# Altium PCB AdcPmodWM8782.PcbDoc
Units mm, origin at the board's own origin, x right, y up, seen from the top; angles counter-clockwise.
Board outline 95.25 x 20.95 mm, 4 copper layers (Component Side, Ground Plane, Power Plane, Solder Side), stack 0.844 mm thick; 45 components, 37 nets, 151 pads, 71 vias.
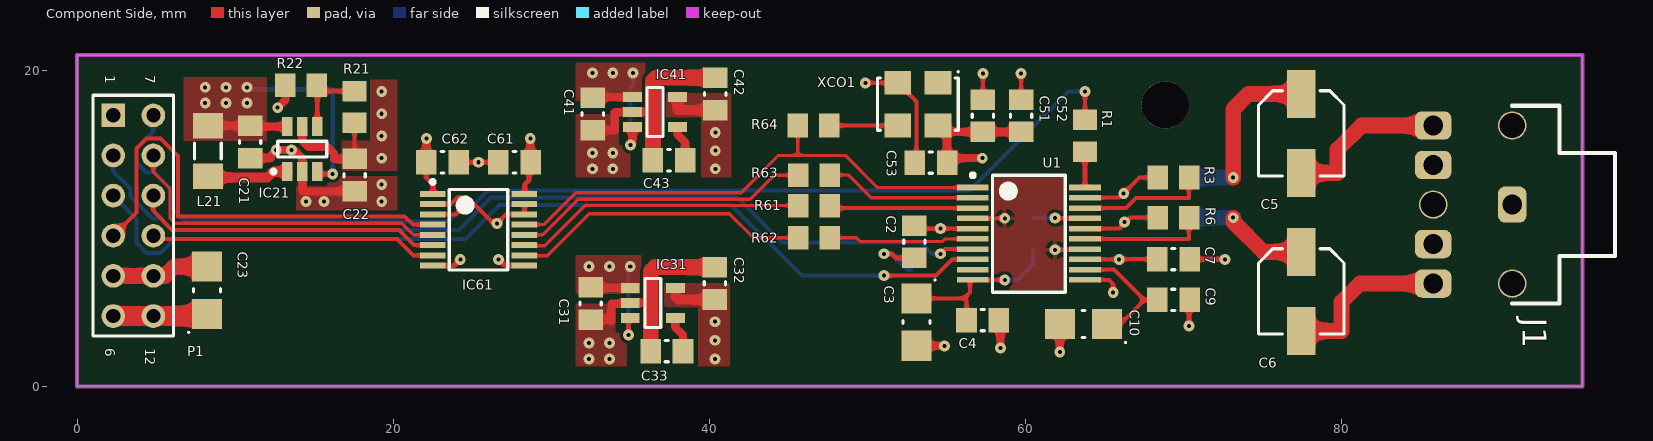
[diagram p0: Component Side view]
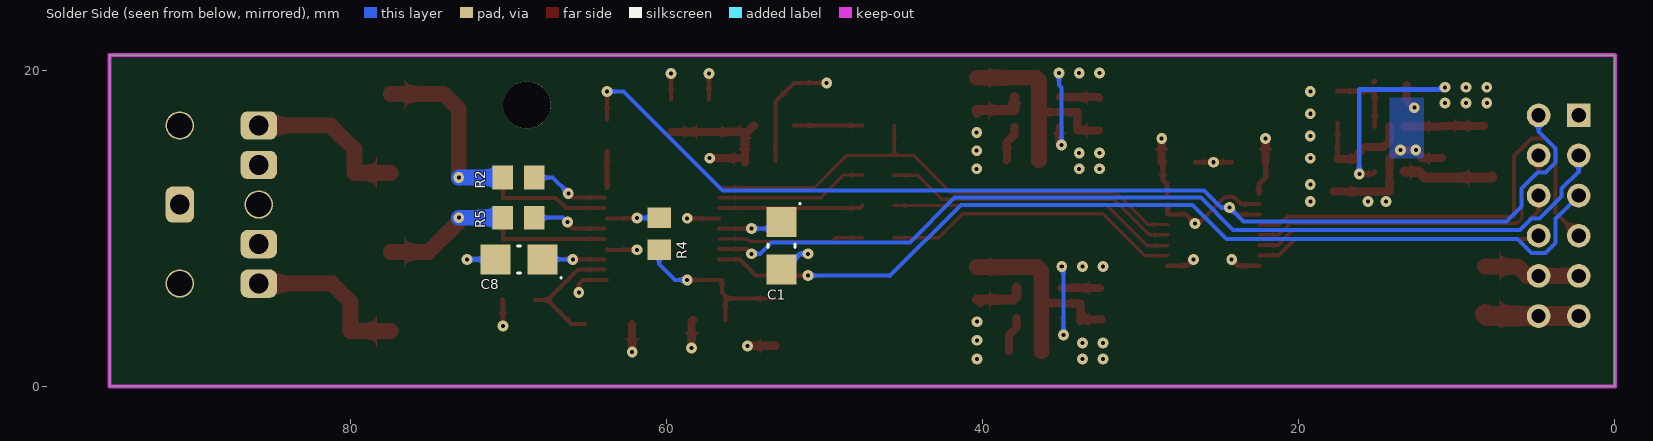
[diagram p1: Solder Side view, seen from below]
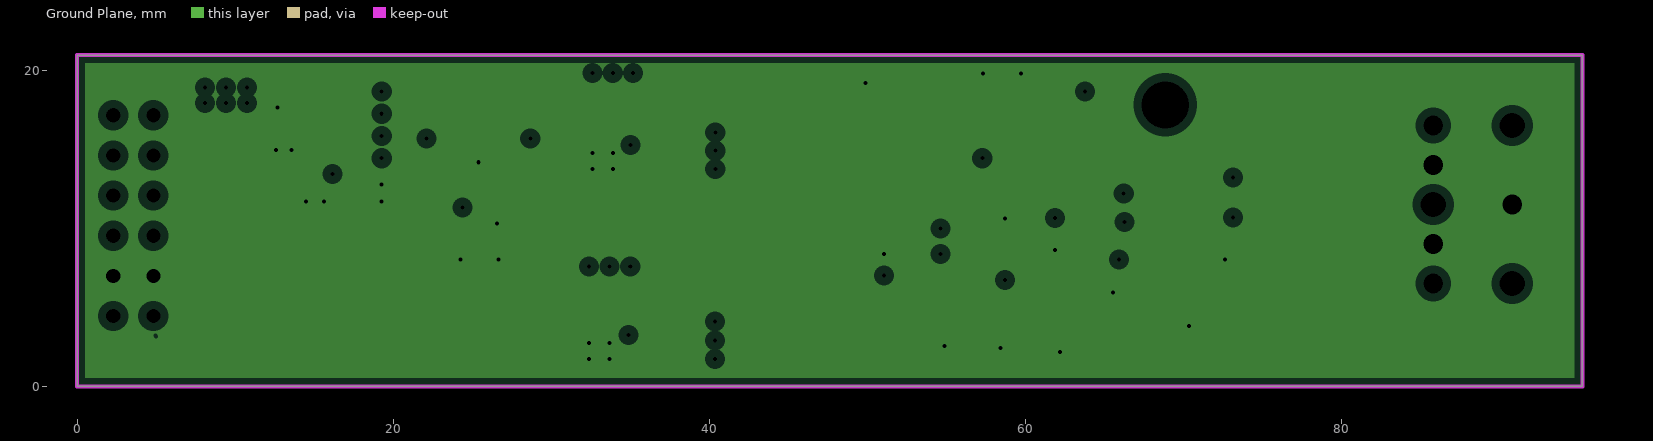
[diagram p2: Ground Plane, clearances drawn from the general rule]
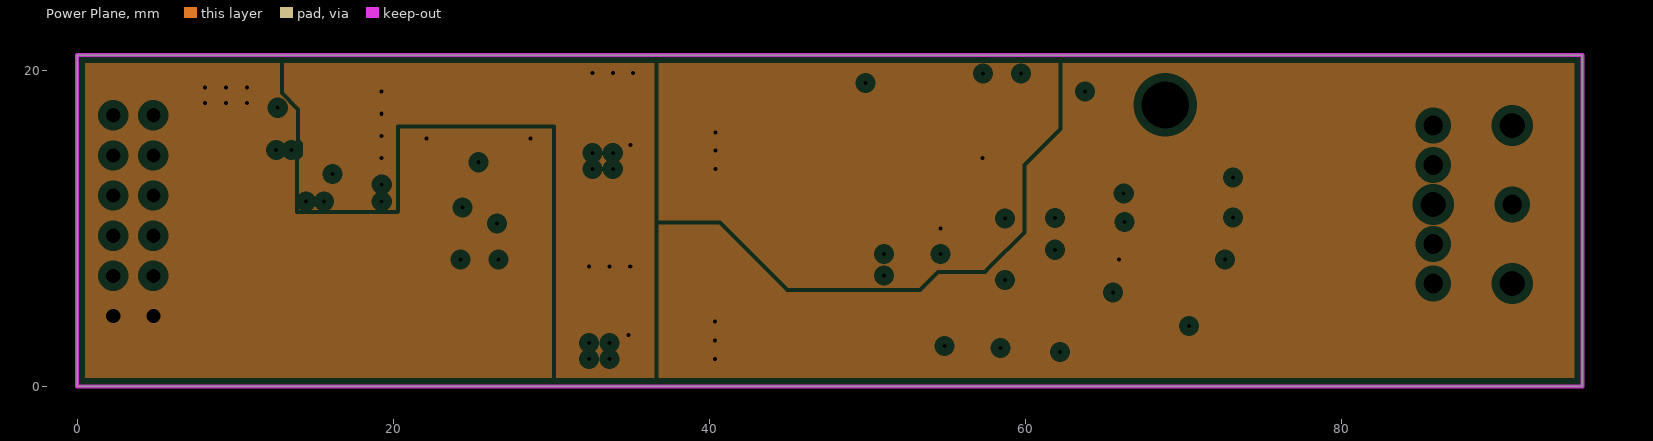
[diagram p3: Power Plane, clearances drawn from the general rule]

## Layer stack, top to bottom
Top Solder: solder mask 0.0102, Solder Resist, Dk 3.5
Component Side: signal copper 0.0356
Dielectric 1: core 0.32, FR-4, Dk 4.8
Ground Plane: plane copper 0.036, net AGND
Dielectric 3: prepreg 0.127, Dk 4.2
Power Plane: plane copper 0.036, net (Multiple Nets)
Dielectric 4: core 0.254, Dk 4.2
Solder Side: signal copper 0.0356
Bottom Solder: solder mask 0.0102, Solder Resist, Dk 3.5

## Board outline
0,0 0,20.95 95.25,20.95 95.25,0

## Design rules (kind name [scope] priority, off if disabled: settings)
Clearance [All] p1: gap=0.203 except(0.254: Arc-Region Arc-Text Track-Region Track-Text SMDPad-Region SMDPad-Text THPad-Region THPad-Text Via-Region Via-Text Fill-Region Fill-Text Poly-Region Poly-Text Region-Region Region-Text Text-Text)
HoleSize [All] p1: absolutevalues=TRUE maxlimit=6 minlimit=0.25 maxpercent=80.000 minpercent=20.000
HoleToHoleClearance [All] p1: gap=0.305 allowstackedmicrovias=TRUE
MinimumSolderMaskSliver [All] p1: minsoldermaskwidth=0.1
PlaneClearance [All] p1: clearance=0.508
PlaneConnect NoConnect [InNamedPolygon('SOLDER_GND_PLANE')] p1: planeconnectstyle=NoConnect reliefexpansion=0.508 reliefentries=4 reliefconductorwidth=0.254 reliefairgap=0.254
PlaneConnect NoRelief [All] p2: planeconnectstyle=Direct reliefexpansion=0.508 reliefentries=4 reliefconductorwidth=0.254 reliefairgap=0.254
PlaneConnect [All] p3: planeconnectstyle=Relief reliefexpansion=0.508 reliefentries=4 reliefconductorwidth=0.254 reliefairgap=0.254
PolygonConnect PolygonConnect_1 [All vs IsNamedPolygon('LDO_REG_PLANE')] p1: connectstyle=Direct reliefconductorwidth=0.254 reliefentries=4 polygonreliefangle="90 Angle" airgapwidth=0.254
PolygonConnect PolygonConnect_NoRelief [All vs (IsNamedPolygon('LDO_REG_PLANE') OR IsNamedPolygon('SPS_PLANE') OR IsNamedPolygon('SOLDER_GND_PLANE'))] p2: connectstyle=Direct reliefconductorwidth=0.254 reliefentries=4 polygonreliefangle="90 Angle" airgapwidth=0.254
PolygonConnect [All] p3: connectstyle=Relief reliefconductorwidth=0.254 reliefentries=4 polygonreliefangle="90 Angle" airgapwidth=0.254
RoutingVias [All] p1: holewidth=0.5 width=1 viastyle="Through Hole" minholewidth=0.25 minwidth=0.66 maxholewidth=1 maxwidth=2 useviatemplates=TRUE viatemplateguid#1={FEAE9B3F-B14B-47A1-B2CF-42D978F5AA74}
SilkToSolderMaskClearance [IsPad] p1: minsilkscreentomaskgap=0.102 clearancetoexposedcopper=TRUE
SolderMaskExpansion [All] p1: expansion=0.076
Width DigitalPower [InNet('3V3')] p1: maxlimit=4 minlimit=0.254 preferedwidth=0.508 minimp=50.000000 maximp=50.000000 favimp=50.000000
Width AnalogLinearPower [(InNet('AVDD') OR InNet('3V3CLK'))] p2: maxlimit=1.27 minlimit=0.254 preferedwidth=0.508 minimp=50.000000 maximp=50.000000 favimp=50.000000
Width AnalogPower [InNet('5V')] p3: maxlimit=4 minlimit=0.254 preferedwidth=0.508 minimp=50.000000 maximp=50.000000 favimp=50.000000
Width [All] p4: maxlimit=1 minlimit=0.203 preferedwidth=0.254
24 further rules are at their usual default settings.

## Classes and differential pairs
component class "A/C WM8782": C1 C2 C3 C4 C5 C6 C7 C8 C9 C10 R1 R2 R3 R4 R5 R6 U1
component class AdcPmod: J1 P1
component class "INTERFEJS CYFROWY": C61 C62 IC61 R61 R62 R63
component class ZASILANIE: C21 C22 C23 C31 C32 C33 C41 C42 C43 IC21 IC31 IC41 L21 R21 R22
component class ZEGAR: C51 C52 C53 R64 XCO1
net class SPS_CTRL_GND: AGND

## Components (designator, comment, footprint, x,y, rotation, side; value= is the part's Value field where it differs from the comment)
C1 "10 uF" CAP_POL1206 52.731,8.89 r270 bottom
C2 "0.1uF" CAP0805 52.985,9.144 r270 top
C3 "10 uF" CAP_POL1206 53.112,4.064 r270 top
C4 "0.1uF" CAP0805 57.303,4.191 r180 top
C5 "10 uF" "CAP EL SMD Dia. 5mm" 77.46,16 r270 top
C6 "10 uF" "CAP EL SMD Dia. 5mm" 77.46,6 r270 top
C7 "0.1uF" CAP0805 69.368,8.044 r0 top
C8 "10 uF" CAP_POL1206 69.342,8.027 r0 bottom
C9 "0.1uF" CAP0805 69.368,5.461 r180 top
C10 "10 uF" CAP_POL1206 63.681,3.937 r180 top
C21 "10uF" CAP0805 10.944,15.455 r90 top
C22 "10uF" CAP0805 17.556,13.357 r90 top
C23 "47uF" CAP_POL1206 8.225,6.075 r90 top
C31 "1uF" CAP0805 32.489,5.238 r90 top
C32 "2.2uF" CAP0805 40.363,6.514 r270 top
C33 "0.01uF" CAP0805 37.315,2.227 r0 top
C41 "1uF" CAP0805 32.631,17.224 r90 top
C42 "2.2uF" CAP0805 40.378,18.499 r270 top
C43 "0.01uF" CAP0805 37.457,14.302 r0 top
C51 "0.1uF" CAP0805 57.32,17.116 r270 top
C52 "0.1uF" CAP0805 59.733,17.116 r270 top
C53 "0.01uF" CAP0805 54.02,14.15 r180 top
C61 "0.1uF" CAP0805 27.675,14.175 r0 top
C62 "0.1uF" CAP0805 23.125,14.175 r180 top
IC21 "" "SOT23 (DDC TI)" 14.25,15.008 r90 top
IC31 "" "SOT23 (5) (DBVTI)" 36.426,5.275 r0 top
IC41 "" "SOT23 (5) (DBVTI)" 36.568,17.35 r0 top
IC61 "74AVCH4T245" TSSOP16 25.4,9.906 r0 top
J1 "Phonejack Stereo SW" "Phone Jack Mini Stereo SJ1 - 354X" 90.805,11.5 r180 top
L21 "4.7uH" "IND1206 (HS)" 8.273,14.881 r270 top
P1 "PMOD 6X2" HDR2X6_CEN 2.286,17.145 r270 top
R1 "10k" RES0805 63.774,15.85 r90 top
R2 "10k" RES0805 69.368,13.208 r180 bottom
R3 "5k" RES0805 69.368,13.208 r180 top
R4 "3.3k" RES0805 60.478,9.652 r270 bottom
R5 "10k" RES0805 69.368,10.668 r0 bottom
R6 "5k" RES0805 69.368,10.668 r180 top
R21 "1.8M" RES0805 17.556,17.675 r270 top
R22 "200k" RES0805 14.177,19.052 r0 top
R61 "RES" RES0805 46.635,11.43 r0 top
R62 "RES" RES0805 46.635,9.398 r0 top
R63 "RES" RES0805 46.625,13.35 r0 top
R64 "RES" RES0805 46.6,16.5 r180 top
U1 "WM8782A" "SSOP16 5.3mm" 60.224,9.652 r0 top
XCO1 "XCO" "XCO 5X3.2MM (HS)" 53.2,17.85 r270 top

## Footprints (in the part's own frame and the unit in brackets; to place one, negate y for a bottom-side part, rotate by r counter-clockwise, add the part's x,y. Pads: shape width x height; smd on the part's side, far side on the other; paste and mask are expansions set on the pad)
CAP0805 [mm] "Chip Capacitor, 2-Leads, Body 2,00x1,25mm, IPC Low Density"
  rect 1.3x1.55 smd: 1(-1.025,0) 2(1.025,0)
  silkscreen extent -0.1,-0.67 0.1,0.67, body extent -1.1,-0.72 1.1,0.72, height 1.5
"CAP EL SMD Dia. 5mm" [mm] "Aluminum Electrolytic Capacitor, Body 5,30x5,30x5,80mm, IPC Low Density"
  rect 3.05x1.8 smd: 1(-2.5,0) 2(2.5,0)
  silkscreen extent -2.7,-2.7 2.7,2.7, body extent -2.75,-2.75 2.75,2.75, height 5.8
CAP_POL1206 [mm] "Chip Tantalum Capacitor, 2-Leads, Body 3,20x1,60mm, IPC Low Density"
  rect 1.9x1.9 smd: 1(-1.5,0) 2(1.5,0)
  silkscreen extent -2.71,-0.85 0.1,1.21, body extent -1.7,-0.9 1.7,0.9, height 2
HDR2X6_CEN [mm] "Connector; Header; 6x2 Position"
  rect 1.5x1.5 hole 0.9: 1(0,0)
  round 1.5 hole 0.9: 2(2.54,0) 3(5.08,0) 4(7.62,0) 5(10.16,0) 6(12.7,0) 7(0,2.54) 8(2.54,2.54) 9(5.08,2.54) 10(7.62,2.54) 11(10.16,2.54) 12(12.7,2.54)
  silkscreen extent -1.27,-1.27 13.97,3.81
"IND1206 (HS)" [mm] "Chip Inductor, 2-Leads, Body 3,20x1,60mm, IPC Low Density"
  rect 1.6x1.9 smd: 1(-1.6,0) 2(1.6,0)
  silkscreen extent -0.5,-0.85 0.5,0.85, body extent -1.7,-0.9 1.7,0.9, height 2
"Phone Jack Mini Stereo SJ1 - 354X" [mm]
  rrect50% 1.8x2.3 hole 1.25: 1(0,0)
  rrect50% 2.3x1.8 hole 1.25: 2(5,-5) 3(5,5) 4(5,-2.5) 5(5,2.5)
  round 1.8 hole 1.6: 6(0,5) 6(0,-5) 6(5,0)
  silkscreen extent -6.5,-6.25 0,6.25, body extent -6.45,-6.13 8.55,6.07, height 4.7
RES0805 [mm] "Chip Resistor, 2-Leads, Body 2,00x1,25mm, IPC Low Density"
  rect 1.3x1.5 smd: 1(-1,0) 2(1,0)
  body extent -1.07,-0.7 1.08,0.7, height 1.5
"SOT23 (5) (DBVTI)" [mm] "SOT23, 5-Leads, Body 2,90x2,80mm, Pitch 0,95mm, IPC Low Density"
  rect 1.2x0.65 smd: 1(-1.425,0.95) 2(-1.425,0) 3(-1.425,-0.95) 4(1.425,-0.95) 5(1.425,0.95)
  silkscreen extent -0.5,-1.55 0.5,1.55, body extent -0.88,-1.52 0.87,1.53, height 1.1
"SOT23 (DDC TI)" [mm] "SOT23, 6-Leads, Body 2,90x2,80mm, Pitch 0,95mm, IPC Low Density"
  rect 1.2x0.65 smd: 1(-1.425,0.95) 2(-1.425,0) 3(-1.425,-0.95) 4(1.425,-0.95) 5(1.425,0) 6(1.425,0.95)
  silkscreen extent -1.55,-1.55 0.5,1.95, body extent -0.88,-1.52 0.87,1.53, height 1.1
"SSOP16 5.3mm" [mm] "SOP, 20-Leads, Body 7,20x5,30mm, Pitch 0,65mm, IPC Low Density"
  rect 2x0.35 smd: 1(-3.55,2.925) 2(-3.55,2.275) 3(-3.55,1.625) 4(-3.55,0.975) 5(-3.55,0.325) 6(-3.55,-0.325) 7(-3.55,-0.975) 8(-3.55,-1.625) 9(-3.55,-2.275) 10(-3.55,-2.925) 11(3.55,-2.925) 12(3.55,-2.275) 13(3.55,-1.625) 14(3.55,-0.975) 15(3.55,-0.325) 16(3.55,0.325) 17(3.55,0.975) 18(3.55,1.625) 19(3.55,2.275) 20(3.55,2.925)
  silkscreen extent -3.67,-3.7 2.3,3.82, body extent -2.7,-3.7 2.7,3.7, height 2
TSSOP16 [mm] "SOP, 16-Leads, Body 5,00x4,40mm, Pitch 0,65mm, IPC Low Density"
  rect 1.6x0.38 smd: 1(-2.9,2.275) 2(-2.9,1.625) 3(-2.9,0.975) 4(-2.9,0.325) 5(-2.9,-0.325) 6(-2.9,-0.975) 7(-2.9,-1.625) 8(-2.9,-2.275) 9(2.9,-2.275) 10(2.9,-1.625) 11(2.9,-0.975) 12(2.9,-0.325) 13(2.9,0.325) 14(2.9,0.975) 15(2.9,1.625) 16(2.9,2.275)
  silkscreen extent -3.02,-2.55 1.85,3.15, body extent -2.25,-2.55 2.25,2.55, height 2
"XCO 5X3.2MM (HS)" [mm] "XCO, Concave, 4-Leads, Pitch 2,54mm,  Body 5,00x3,20mm,  IPC Low Density"
  rect 1.5x1.7 smd: 1(-1.35,1.27) 2(-1.35,-1.27) 3(1.35,-1.27) 4(1.35,1.27)
  silkscreen extent -2.1,-2.55 1.65,2.6, body extent -1.65,-2.55 1.65,2.55, height 1

## Part data
C1 C3 C8 C10 C23: library part CAP_POL, "Capacitor Tantalum - Polymer"
C2 C4 C7 C9 C21 C22 C31 C32 C33 C41 C42 C43 C51 C52 C53 C61 C62: library part CAP, "Ceramic X7R"
C5 C6: library part CAP_POL, "Electrolytic"
IC21: library part TPS6107x, "Adjustable, 600-mA Switch, 90% Efficient PFM/PWM Boost Converter"
IC31 IC41: library part TPS730x
IC61: "Translation - Voltage Levels 4-Bit Dual-Supply Bus Xcvr"
J1: "3-Conductor Jack with 2 break contacts (normals) and 2 auxiliary make contacts"
L21: library part IND, "Inductor"
P1: library part "Header 6X2A", "Header, 6-Pin, Dual row"
R1 R2 R3 R5 R6 R22: library part RES, "Thin Film"
R4: library part RES, "Resistor"
R21: library part RES, "Thick Film"
R61 R62 R63 R64: "Resistor"
U1: library part WM8782, "24-Bit, 192 kHz Stereo ADC"
XCO1: "Standard Clock Oscillator"

## Free pads (board coordinates)
  round 3 hole 3: 2(68.85,17.8)

## Via types
v1: diameter 0.686, hole 0.254, Component Side to Solder Side, 71 vias

## Nets (pads, with @x,y where several pads share a name; then routed paths per layer and width w, separated by ;. In a path a pad name is that pad's centre, name@x,y a point inside that pad or via, vN(x,y) a via of type N, cw(c..) or ccw(c..) an arc to the next point about the centre after c; other vN are vias at no path point)
3V3: C21.2 C23.1 C61.2 C62.2 IC21.3 IC21.6 IC61.1 IC61.16 L21.1 P1.6 P1.12 | length 30.6
  Component Side w0.254: IC21.3 IC21.3@15.244,13.539
  Component Side w0.305: IC21.3 15.351,13.432 v1(16.174,13.432) ; C62.2 22.1,13.2 22.525,12.775 22.525,12.206 IC61.1 ; IC61.16 28.325,12.206 28.325,12.775 28.6,13.05 C61.2@28.6,14.2
  Component Side w0.508: L21.1 8.274,16.48 C21.2@10.694,16.48 ; C21.2@10.693,16.481 C21.2@10.694,16.48 ; C21.2 C21.2@10.694,16.48 ; IC21.6@13.253,16.48 IC21.6 10.741,16.433 C21.2@10.694,16.48 ; C62.2 v1(22.1,15.685) ; C61.2@28.6,14.2 C61.2@28.625,14.175 ; C61.2@28.675,14.2 v1(28.675,15.685)
  Component Side w1.27: P1.6 P1.12 8.095,4.445 C23.1
  Solder Side w0.305: v1@10.741,18.818 10.782,18.777 16.174,18.777 v1(16.174,13.432)
  other v1: 8.105,17.918 9.423,17.918 10.741,17.918 8.105,18.918 9.423,18.918 10.741,18.918
5V: C22.2 C31.2 C41.2 IC21.5 IC31.1 IC31.3 IC41.1 IC41.3 R21.2 | length 23.7
  Component Side w0.254: C22.2 R21.2@17.556,16.7 ; C31.2@32.479,6.126 32.489,6.136 C31.2@32.578,6.225 ; C41.2@32.582,18.298 C41.2 ; v1(34.891,3.243) 34.891,4.215 IC31.3
  Component Side w0.508: IC21.5 14.25,15.525 14.636,15.139 15.845,15.139 16.255,14.73 16.255,14.382 C22.2 ; C31.2@32.578,6.225 IC31.1 ; C41.2 32.682,18.3 IC41.1 ; v1(35.016,15.258) 35.143,15.385 IC41.3
  Solder Side w0.254: v1(34.891,3.243) 34.891,7.429 v1@35.001,7.539 ; v1(35.016,15.258) 35.016,18.91 35.174,19.068 v1(35.174,19.83)
  other v1: 32.381,7.572 33.691,7.572 35.001,7.572 19.275,14.43 19.275,15.836 19.275,17.243 19.275,18.65 32.606,19.83 33.895,19.83
AGND: C1.2 C2.2 C3.2 C4.1 C7.2 C8.2 C9.1 C10.2 C21.1 C22.1 C23.2 C31.1 C32.1 C33.1 C41.1 C42.1 C43.1 C51.1 C52.1 C53.2 C61.1 C62.1 IC21.2 IC31.2 IC41.2 IC61.2 IC61.8 IC61.9 IC61.14 IC61.15 J1.1 J1.4 J1.5 P1.5 P1.11 R22.1 U1.4 U1.11 U1.14 XCO1.2 | length 91.6
  Component Side w0.254: IC61.2 23.652,11.531 24.105,11.984 24.663,11.984 26.347,10.3 v1(26.57,10.3) 27.151,10.881 IC61.14 IC61.15 ; C62.1@24.225,14.175 v1(25.4,14.175) C61.1@26.575,14.175 ; v1(49.875,19.2) XCO1.2 53.11,18.02 C53.2@53.11,14.265 ; U1.4 v1(58.7,10.627) ; C51.1 v1(57.32,19.783) ; C52.1 v1(59.733,19.783) ; v1(61.875,8.636) 63.733,8.636 U1.14 ; U1.11 65.304,6.727 65.558,6.473 v1(65.558,5.927)
  Component Side w0.305: IC61.8 23.852,7.631 v1(24.248,8.027) ; v1(26.67,8.027) 27.066,7.631 IC61.9 ; v1(51.054,8.382) 51.553,8.382 51.816,8.119 C2.2 ; v1(70.358,3.81) 70.358,5.426 C9.1 ; C7.2 72.627,8.044 v1(72.644,8.027)
  Component Side w0.508: C21.1 12.281,14.43 12.281,14.628 v1(12.6,14.947) v1(13.556,14.947) 13.751,14.947 14.25,14.447 IC21.2 14.259,13.574 14.259,12.332 C22.1@17.806,12.332 ; v1(12.695,17.625) 13.177,18.106 R22.1 ; C31.1 33.805,4.213 ; C41.1 34.02,16.199 34.02,17.342 34.028,17.35 IC41.2 36.416,17.35 36.432,17.366 36.441,17.375 ; 33.805,4.086 33.805,5.229 34.955,5.229 IC31.2 36.29,5.275 ; C3.2 54.907,2.564 v1(54.883,2.54) ; C4.1 58.42,4.099 v1(58.42,2.413) ; v1(62.181,2.159) C10.2
  Component Side w1: P1.5 P1.11 5.567,6.985 6.157,7.575 C23.2 ; C33.1 36.304,2.241 36.304,7.28 36.563,7.539 C32.1 ; C43.1 36.447,14.302 36.447,19.333 36.637,19.524 C42.1
  Solder Side w0.305: v1(51.054,8.382) 51.562,8.382 52.554,7.39 C1.2 ; C8.2 v1(72.644,8.027)
  other v1: 32.381,1.73 33.691,1.73 32.381,2.746 33.691,2.746 14.475,11.7 15.625,11.7 19.275,11.7 19.275,12.775 32.606,13.761 33.895,13.761 32.606,14.75 33.895,14.75
AVDD: C7.1 C8.1 C32.2 IC31.5 U1.13 | length 9.7
  Component Side w0.254: U1.13@63.949,8.027 v1(65.939,8.027) 65.956,8.044 C7.1
  Component Side w0.508: C32.2@40.149,5.275 C32.2
  Component Side w0.635: IC31.5 37.851,5.687 38.049,5.489 C32.2
  Solder Side w0.254: v1(65.939,8.027) C8.1
  other v1: 40.363,1.73 40.363,2.908 40.363,4.086
BCLK: R62.2 U1.6 | length 9.2
  Component Side w0.203: R62.2@47.61,9.398 49.302,9.398 49.537,9.163 54.756,9.163 54.92,9.327 U1.6
BCLK_BUF: IC61.10 R62.1 | length 19.1
  Component Side w0.203: IC61.10 28.326,8.255 29.744,8.255 32.411,10.922 41.275,10.922 42.799,9.398 R62.1
COM: R4.1 U1.17 | length 3.3
  Component Side w0.254: v1(61.875,10.652) 61.9,10.627 U1.17
  Solder Side w0.254: R4.1 v1(61.875,10.652)
DOUT: R63.2 U1.2 | length 9.7
  Component Side w0.203: R63.2 47.65,13.375 48.8,13.375 50.248,11.927 U1.2
DOUT_BUF: IC61.12 R63.1 | length 18.9
  Component Side w0.203: IC61.12 29.453,9.581 31.709,11.836 42.586,11.836 44.1,13.35 R63.1
DVDD: C1.1 C2.1 C42.2 C51.2 C52.2 C53.1 IC41.5 U1.5 XCO1.4 | length 18.3
  Component Side w0.254: C2.1 53.177,9.977 v1(54.636,9.977) U1.5
  Component Side w0.508: IC41.5@37.965,18.272 IC41.5 ; C42.2@40.378,17.224 C42.2@40.378,17.233 ; XCO1.4 54.879,16.091 C51.2 C52.2 ; C53.1 XCO1.4@55.045,15.925 ; C53.1@55.325,14.43 v1(57.275,14.43)
  Component Side w0.635: IC41.5 37.993,17.474 C42.2
  Solder Side w0.254: C1.1 53.144,9.977 v1(54.636,9.977) v1@54.636,9.906
  other v1: 40.381,13.761 40.381,14.904 40.381,16.047
FORMAT: U1.9
FSAMPEN: P1.3 U1.8 | length 60.4
  Component Side w0.254: v1(51.05,7) 54.3,7 54.323,6.978 55.372,8.027 U1.8
  Solder Side w0.254: P1.3 3.727,10.624 3.746,10.624 3.746,9.078 4.379,8.445 5.273,8.445 6.156,9.327 24.567,9.327 26.721,11.481 41.383,11.481 45.886,6.978 45.909,7 v1(51.05,7)
IN_L: C5.2 J1.2 | length 10.5
  Component Side w1: C5.2 79.756,13.5 79.756,14.976 81.28,16.5 J1.2
IN_R: C6.2 J1.3 | length 10.7
  Component Side w1: C6.2 80.01,3.5 80.01,5.334 81.176,6.5 J1.3
IWL: P1.2 U1.7 | length 59.7
  Component Side w0.254: v1(54.636,8.382) 54.931,8.677 U1.7
  Solder Side w0.254: P1.2 2.286,13.593 3.366,12.512 3.366,11.997 4.758,10.605 5.273,10.605 5.992,9.887 24.152,9.887 26.203,11.938 41.783,11.938 44.611,9.11 53.378,9.11 54.106,8.382 v1(54.636,8.382)
LRCLK: R61.2 U1.3 | length 9.1
  Component Side w0.254: R61.2@47.61,11.43 47.763,11.277 U1.3
LRCLK_BUF: IC61.11 R61.1 | length 18.4
  Component Side w0.203: IC61.11 28.341,8.89 29.59,8.89 32.13,11.43 R61.1
MCLK: IC61.13 R64.2 U1.1 | length 32.9
  Component Side w0.203: IC61.13 29.529,10.231 31.54,12.243 42.018,12.243 44.38,14.605 45.6,14.605 ; R64.2 45.6,14.605 ; U1.1 50.623,12.577 48.595,14.605 45.6,14.605
NetC5_1: C5.1 R2.1 | length 11.8
  Component Side w1: v1(73.152,13.208) 73.152,17.526 74.126,18.5 C5.1
  Solder Side w1: R2.1 v1(73.152,13.208)
NetC6_1: C6.1 R5.2 | length 8.1
  Component Side w1: v1(73.152,10.668) 73.152,10.414 75.066,8.5 C6.1
  Solder Side w1: R5.2 v1(73.152,10.668)
NetC33_2: C33.2 IC31.4 | length 2.3
  Component Side w0.508: IC31.4 37.851,3.723 38.34,3.234 C33.2
NetC43_2: C43.2 IC41.4 | length 2.3
  Component Side w0.508: IC41.4 37.993,15.937 38.473,15.457 38.473,14.311 C43.2
NetIC21_1: IC21.1 L21.2 | length 5.8
  Component Side w0.635: L21.2@7.773,13.281 7.773,13.208 12.041,13.208 12.415,13.583 IC21.1
NetIC21_4: IC21.4 R21.1 R22.2 | length 4.7
  Component Side w0.305: IC21.4 R22.2@15.2,18.745 ; R22.2@15.2,19.31 R22.2@15.27,19.24 ; R22.2@15.27,18.675 R21.1
NetR1_1: R1.1 U1.20 | length 2.3
  Component Side w0.305: U1.20 R1.1
NetR2_2: R2.2 R3.2 U1.19 | length 7.6
  Component Side w0.254: U1.19@63.949,11.927 63.96,11.938 65.956,11.938 67.226,13.208 R3.2@68.393,13.208
  Solder Side w0.254: v1(66.225,12.207) 66.225,12.224 67.209,13.208 R2.2@68.393,13.208
NetR3_1: R3.1 U1.18 | length 7.9
  Component Side w0.254: U1.18@63.949,11.277 66.36,11.277 67.01,11.927 70.343,11.927 R3.1@70.343,13.208
NetR5_1: R5.1 R6.2 U1.16 | length 7
  Component Side w0.254: U1.16@63.949,9.977 65.956,9.977 66.647,10.668 R6.2@68.393,10.668
  Solder Side w0.254: v1(66.275,10.4) 66.306,10.4 66.574,10.668 R5.1@68.393,10.668
NetR6_1: R6.1 U1.15 | length 7.7
  Component Side w0.254: U1.15@63.949,9.327 70.343,9.327 R6.1@70.343,10.668
NetR64_1: R64.1 XCO1.3 | length 4.3
  Component Side w0.254: R64.1 XCO1.3
PMOD_BCLK: IC61.7 P1.10 | length 18.2
  Component Side w0.254: P1.10 5.024,9.327 20.247,9.327 21.293,8.281 IC61.7
PMOD_DOUT: IC61.5 P1.8 | length 21.5
  Component Side w0.203: P1.8 4.826,13.557 5.881,12.502 5.881,10.634 6.196,10.319 20.542,10.319 21.28,9.581 IC61.5
PMOD_LRCLK: IC61.6 P1.9 | length 19.7
  Component Side w0.254: P1.9@4.912,11.979 P1.9 4.826,11.078 6.017,9.887 20.363,9.887 21.319,8.931 IC61.6
PMOD_M/S: IC61.3 P1.7 R1.2 | length 73
  Component Side w0.254: IC61.3 23.962,10.881 24.384,11.303 v1(24.384,11.311) ; R1.2 R1.2 v1(63.775,18.65)
  Solder Side w0.254: P1.7 4.826,16.133 3.746,15.052 3.746,14.158 4.379,13.525 4.894,13.525 5.906,12.512 5.906,11.366 6.858,10.414 23.487,10.414 v1(24.384,11.311) 24.929,11.311 26.014,12.395 56.47,12.395 62.725,18.65 v1(63.775,18.65)
PMOD_MCLK: IC61.4 P1.4 | length 29.7
  Component Side w0.254: P1.4 3.746,10.985 3.746,15.052 4.379,15.685 5.273,15.685 6.375,14.584 6.375,10.751 20.721,10.751 21.24,10.231 IC61.4
VMID: C3.1 C4.2 R4.2 U1.10 | length 10.9
  Component Side w0.254: C3.1 56.136,5.564 ; C4.2 56.278,5.422 56.136,5.564 ; U1.10@56.499,6.727 56.499,5.927 56.136,5.564 ; U1.10 58.696,6.727 v1(58.7,6.731)
  Solder Side w0.254: v1(58.7,6.731) 59.462,6.731 60.478,7.747 R4.2
VREFP: C9.2 C10.1 U1.12 | length 8.2
  Component Side w0.254: U1.12@63.949,7.377 65.619,7.377 67.535,5.461 ; C10.1 66.011,3.937 67.535,5.461 ; C9.2 67.535,5.461
pads on no net: J1.6 P1.1 XCO1.1

## Polygon pours and split planes (outlines as drawn)
AGND on Solder Side "SPS_PLANE_CTRL" (solid, pour order 38): 12.092,14.43 12.11,18.258 13.126,18.258 14.251,18.258 14.251,14.43
AGND on Component Side "SPS_PLANE_CTRL" (solid, pour order 42): 58,13.226 58,6.1 62.4,6.1 62.4,13.226 58,13.226
AGND on Component Side "LDO_REG_PLANE" (solid, pour order 24): 31.564,17.201 34.285,17.201 34.285,15.258 35.016,15.258 35.016,13.226 33.269,13.226 31.564,13.226
DVDD on Component Side "LDO_REG_PLANE" (solid, pour order 30): 37.27,18.541 41.378,18.541 41.378,13.226 39.492,13.226 39.492,17.036 37.27,17.036 37.27,17.862
5V on Component Side "LDO_REG_PLANE" (solid, pour order 28): 35.936,18.052 31.564,18.052 31.564,20.465 33.65,20.465 35.936,20.465 35.936,19.195
AVDD on Component Side "LDO_REG_PLANE" (solid, pour order 18): 37.147,6.525 41.299,6.525 41.299,6.324 41.299,1.254 40.255,1.254 39.299,1.254 39.299,4.99 37.594,4.99 37.147,4.99 37.147,5.677
AGND on Component Side "LDO_REG_PLANE" (solid, pour order 16): 31.549,5.229 34.049,5.229 34.049,3.381 34.794,3.381 34.794,1.254 33.27,1.254 31.549,1.254
5V on Component Side "LDO_REG_PLANE" (solid, pour order 14): 35.683,5.863 35.683,6.429 35.683,8.275 31.549,8.275 31.549,5.863
AGND on Component Side "SPS_PLANE" (solid, pour order 32): 13.87,12.669 13.87,11.125 20.255,11.125 20.255,13.304 15.845,13.304 15.845,12.739 15.775,12.669
5V on Component Side "SPS_PLANE" (solid, pour order 12): 18.562,19.393 20.505,19.393 20.255,19.393 20.255,19.143 20.255,13.643 16.755,13.643 16.755,15.525 18.562,15.525 18.562,17.45
3V3 on Component Side "SPS_PLANE" (solid, pour order 6): 12.005,19.554 12.005,15.525 6.755,15.525 6.755,19.554
AGND on Ground Plane (split plane): 94.74,0.51 0.51,0.51 0.51,20.44 94.74,20.44
DVDD on Power Plane (split plane): 62.101,16.34 59.852,14.092 59.824,14.05 59.815,14 59.815,9.79 57.62,7.595 57.383,7.358 54.472,7.358 54.423,7.348 54.381,7.32 53.286,6.225 45.008,6.225 40.767,10.467 40.725,10.495 40.675,10.504 36.779,10.504 36.779,20.44 62.101,20.44
AVDD on Power Plane (split plane): 94.74,0.51 36.779,0.51 36.779,10.246 40.621,10.246 44.862,6.004 44.904,5.976 44.954,5.967 53.34,5.967 53.39,5.976 53.432,6.004 54.526,7.099 57.436,7.099 57.486,7.109 57.528,7.137 57.803,7.412 60.036,9.644 60.064,9.686 60.073,9.736 60.073,13.946 62.322,16.194 62.35,16.236 62.359,16.286 62.359,20.44 94.74,20.44
3V3 on Power Plane (split plane): 12.825,18.542 12.834,18.492 12.862,18.45 13.841,17.472 13.841,15.55 13.85,15.501 13.878,15.459 14.046,15.292 14.046,14.679 13.833,14.467 13.805,14.425 13.796,14.375 13.796,11.025 13.805,10.975 13.833,10.933 13.875,10.905 13.925,10.896 20.275,10.896 20.325,10.905 20.367,10.933 20.385,10.96 20.412,10.978 20.44,11.02 20.449,11.07 20.449,16.321 30.047,16.321 30.047,8.331 30.047,6.6 30.047,0.51 0.51,0.51 0.51,20.44 12.825,20.44
5V on Power Plane (split plane): 36.521,0.51 30.306,0.51 30.306,6.6 30.306,8.331 30.306,16.45 30.296,16.5 30.268,16.542 30.226,16.57 30.176,16.579 20.32,16.579 20.27,16.57 20.228,16.542 20.2,16.5 20.191,16.45 20.191,11.154 14.054,11.154 14.054,14.321 14.267,14.533 14.295,14.575 14.304,14.625 14.304,15.345 14.295,15.395 14.267,15.437 14.099,15.604 14.099,17.526 14.09,17.576 14.062,17.618 13.083,18.596 13.083,20.44 36.521,20.44

## Keep-outs
Keep-Out Layer:
  the board outline again, w0.254

## Other copper
Ground Plane (plane layer: these items are gaps in the copper):
  lines w0.254: 4.95,3.2 5,3.15
Power Plane (plane layer: these items are gaps in the copper):
  lines w0.254: 12.954,20.955 12.954,18.542 13.97,17.526 13.97,15.55 14.175,15.345 14.175,14.625 13.925,14.375 13.925,11.025 20.275,11.025 ; 20.32,11.07 20.32,16.45 30.176,16.45 30.176,8.331 30.176,6.6 30.176,-0.05 ; 36.625,0 36.65,0.025 36.65,20.955 ; 36.65,10.375 40.675,10.375 44.954,6.096 53.34,6.096 54.472,7.228 57.436,7.228 57.711,7.504 59.944,9.736 59.944,14 62.23,16.286 62.23,20.955

## Text inside footprints (layer, text, board x,y; h text height)
P1: Top Overlay "7" at 4.318,19.685 h0.64 r270; Top Overlay "1" at 1.778,19.685 h0.64 r270; Top Overlay "6" at 1.778,2.413 h0.64 r270; Top Overlay "12" at 4.318,2.413 h0.64 r270